# EAGLE board Transmitter+Bug-BC547 (EAGLE 7.7.0)
Simple FM Transmitter with Electret Microphone, based on NPN Transistor
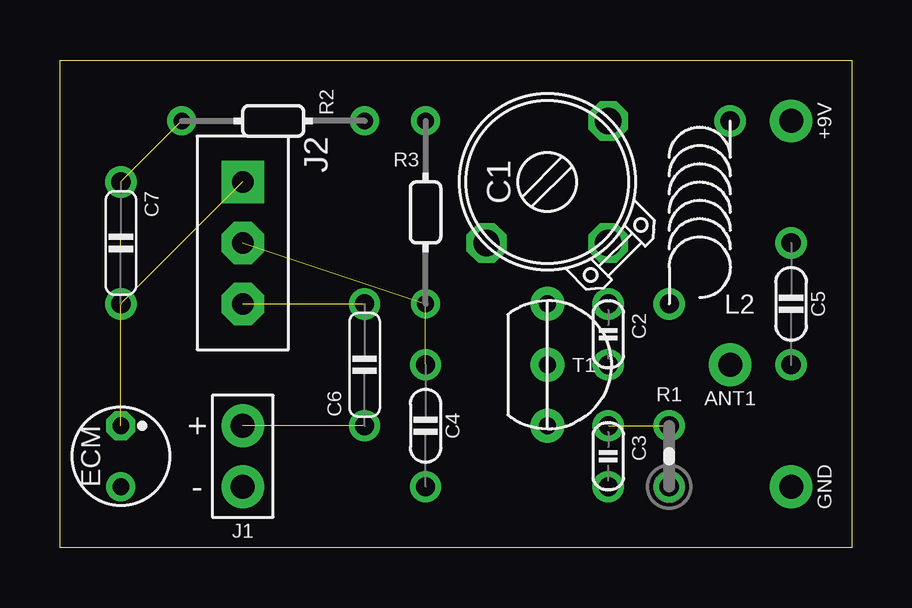
[diagram p0: board, top side]
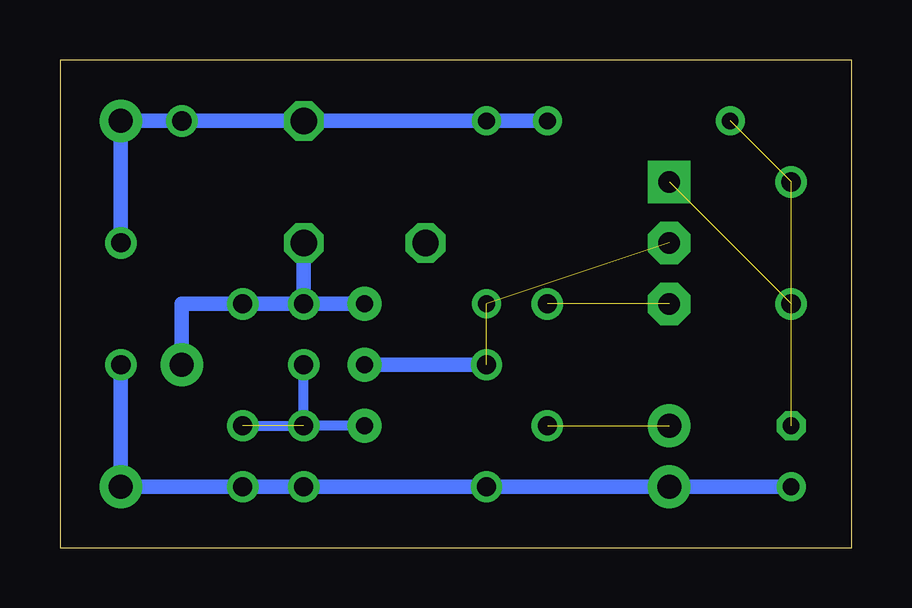
[diagram p1: board, bottom side, seen from below]

Size 33.02 x 20.32 mm. Coordinates in mm from the lower left corner, seen from the top.
Outline: 33.02,0 0,0 0,20.32 33.02,20.32 33.02,0
Copper layers (1*16): Top 0.035mm / dielectric 1.5mm / Bottom 0.035mm
Design rules "default": minimum track width 10mil, minimum drill 24mil, track to track 8mil, track to pad 8mil, pad to pad 8mil, via to via 8mil, smd to smd 8mil, copper to edge 40mil, drill to drill 8mil, minimum pad ring 10mil, minimum via ring 8mil, stop-mask expansion 4mil, vias tented up to drill 0mil, thermal gap 10mil
Net classes: 0 default: width 0.61 mm

## Footprints (pad centres in the part's own frame; a part is rotated, then mirrored left to right if it is on the bottom)
SPAD = drill 1 pad 1.778: 1 0,0
TRIM-2222-808 = drill 1.1 octagon: 1 -2.54,2.54; 2 -2.54,-2.54; 3 2.54,-2.54
C025-015X024 = drill 0.8: 1 -1.27,0; 2 1.27,0
C050-020X036/V = drill 0.8: 1 0,-2.54; 2 0,2.54
C050-020X044 = drill 0.8: 1 -2.54,0; 2 2.54,0
ECM-4 = drill 0.7 pad 1.2 octagon: 1 0,1.27 | drill 0.7 pad 1.2: 2 0,-1.27
SPAD-+ = drill 1 pad 1.778: 1 0,-1.27; 2 0,1.27
CONN-3P = drill 0.9 pad 1.778 square: 1 0,0 | drill 0.9 pad 1.778 octagon: 2 2.54,0; 3 5.08,0
L-04/7V-X = drill 0.8: 1 -1.27,-3.81; 2 1.27,3.81
0204/2V = drill 0.8: 1 0,1.27; 2 0,-1.27
0202/7-V = drill 0.7: 1 0,3.81; 2 0,-3.81
TO92-CBE = drill 0.7 pad 1.422: B 0,0; C 0,2.54; E 0,-2.54

## Placement (x,y rotation side)
+9V  SPAD  [SPAD]  30.48,17.78 180 top
ANT1  ANT  [SPAD]  27.94,7.62 90 top
C1  1.6-15pF  [TRIM-2222-808]  20.32,15.24 90 top
C2  4.7pF  [C025-015X024]  22.86,8.89 270 top
C3  1nF  [C025-015X024]  22.86,3.81 270 top
C4  1nF  [C050-020X036/V]  15.24,5.08 180 top
C5  22nF  [C050-020X036/V]  30.48,10.16 180 top
C6  330nF  [C050-020X044]  12.7,7.62 90 top
C7  330nF  [C050-020X044]  2.54,12.7 270 top
ECM  ECM-4  [ECM-4]  2.54,3.81 0 top
GND  SPAD  [SPAD]  30.48,2.54 180 top
J1  [SPAD-+]  7.62,3.81 0 top
J2  [CONN-3P]  7.62,15.24 270 top
L2  1uH  [L-04/7V-X]  26.67,13.97 0 top
R1  4.7  [0204/2V]  25.4,3.81 0 top
R2  4.7k  [0202/7-V]  8.89,17.78 270 top
R3  33k  [0202/7-V]  15.24,13.97 0 top
T1  BC547  [TO92-CBE]  20.32,7.62 0 top

## Library data of the parts
+9V ANT1 GND J1 = pad
C1 = cap-trim
C2-C7 = c
ECM = ECM
J2 = pinconn
L2 = l
R1-R3 = r
T1 = t

## Nets
+UB: +9V.1 C1.3 C5.1 L2.2 R2.1 R3.1
GND: C3.2 C4.2 C5.2 ECM.2 GND.1 J1.1 R1.2
MOD: C4.1 J2.2 R3.2 T1.B
N$1: C6.2 J2.3
N$2: ANT1.1 C1.2 C2.1 L2.1 T1.C
N$3: C2.2 C3.1 R1.1 T1.E
N$4: C7.2 J2.1
N$5: C6.1 J1.2
N$6: C7.1 ECM.1 R2.2

## Tracks (layer width: path | path; a pad name or v marks a point on that pad's centre or on a via)
+UB
  Bottom 0.61: C5.1 +9V.1 C1.3 L2.2 R3.1 R2.1
GND
  Bottom 0.61: ECM.2 J1.1 C4.2 GND.1 | C5.2 GND.1 | C3.2 GND.1 | GND.1 R1.2
MOD  (2 unrouted)
  Bottom 0.61: T1.B C4.1
N$1  (1 unrouted)
N$2
  Bottom 0.61: L2.1 T1.C C2.1 | C2.1 C1.2 | ANT1.1 27.94,10.16 L2.1 | L2.1 C2.1
N$3  (1 unrouted)
  Bottom 0.406: R1.1 C3.1 | C3.1 C2.2 | T1.E C3.1
N$4  (1 unrouted)
N$5  (1 unrouted)
N$6  (2 unrouted)